# Altium PCB LM2596_DC_DC.PcbDoc
Units mm, origin at the board's own origin, x right, y up, seen from the top; angles counter-clockwise.
Board outline 43.5 x 27.5 mm, 2 copper layers (Top Layer, Bottom Layer), stack 1.571 mm thick; 7 components, 5 nets, 26 pads, 59 vias.
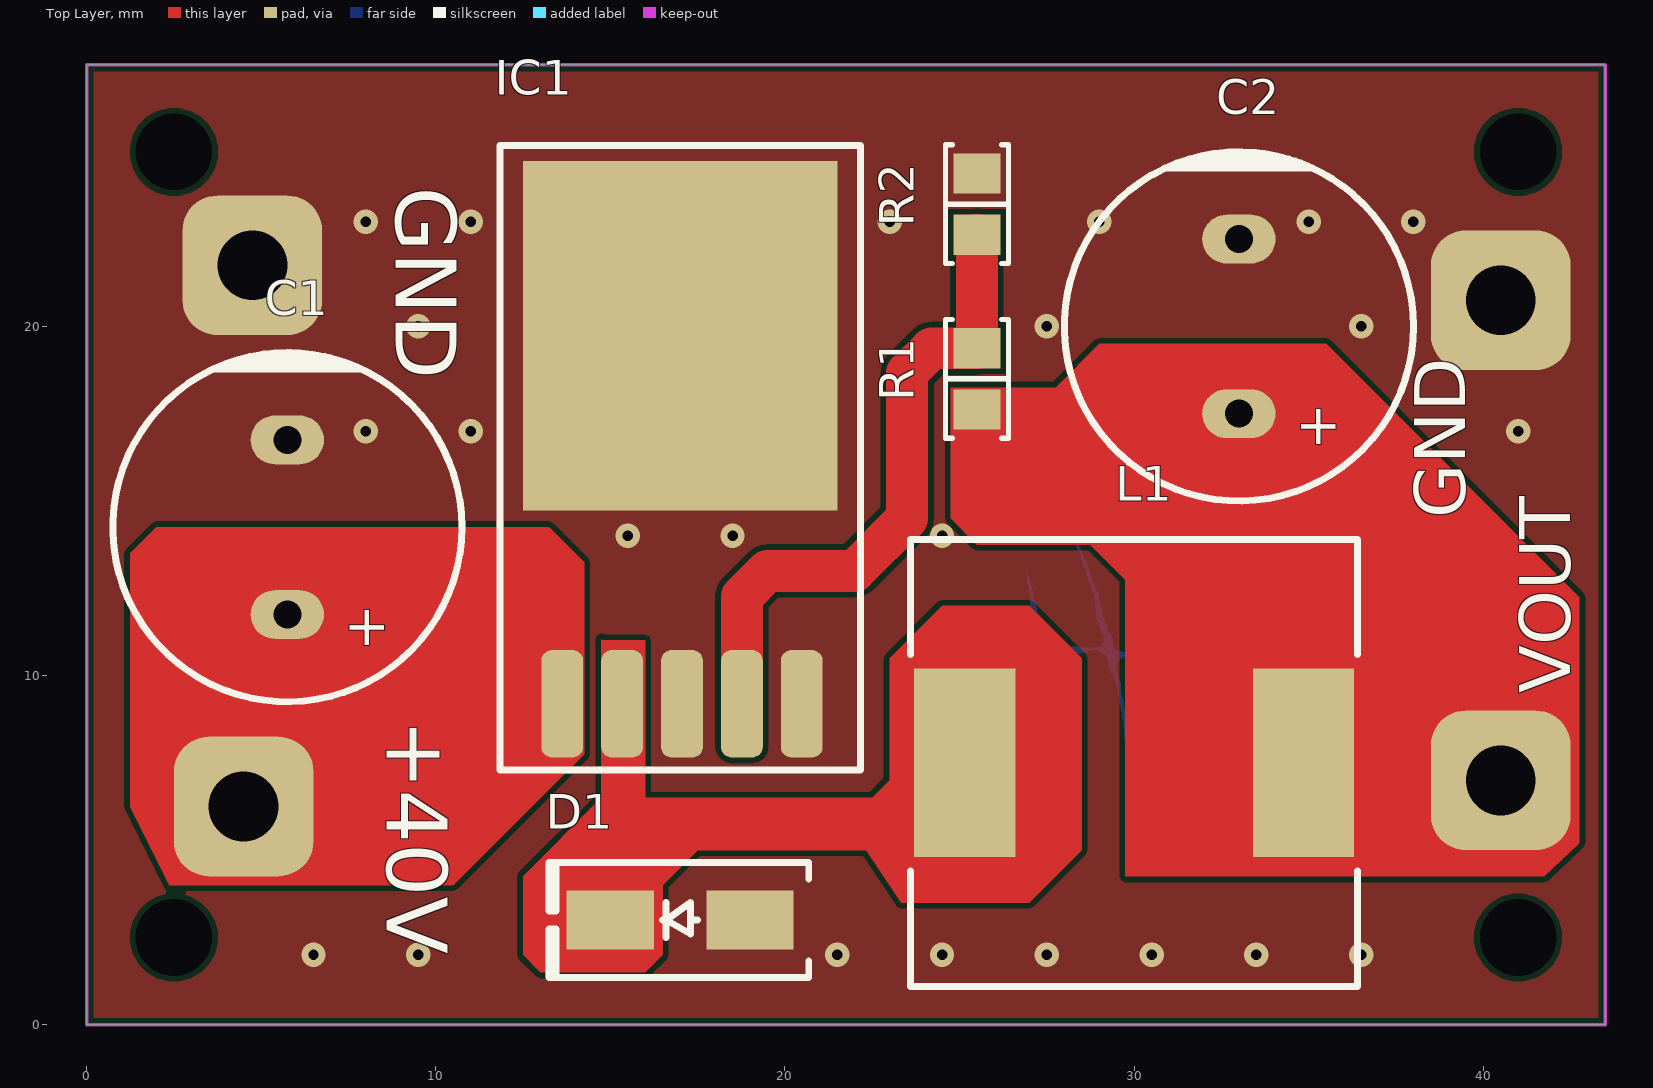
[diagram p0: Top Layer view]
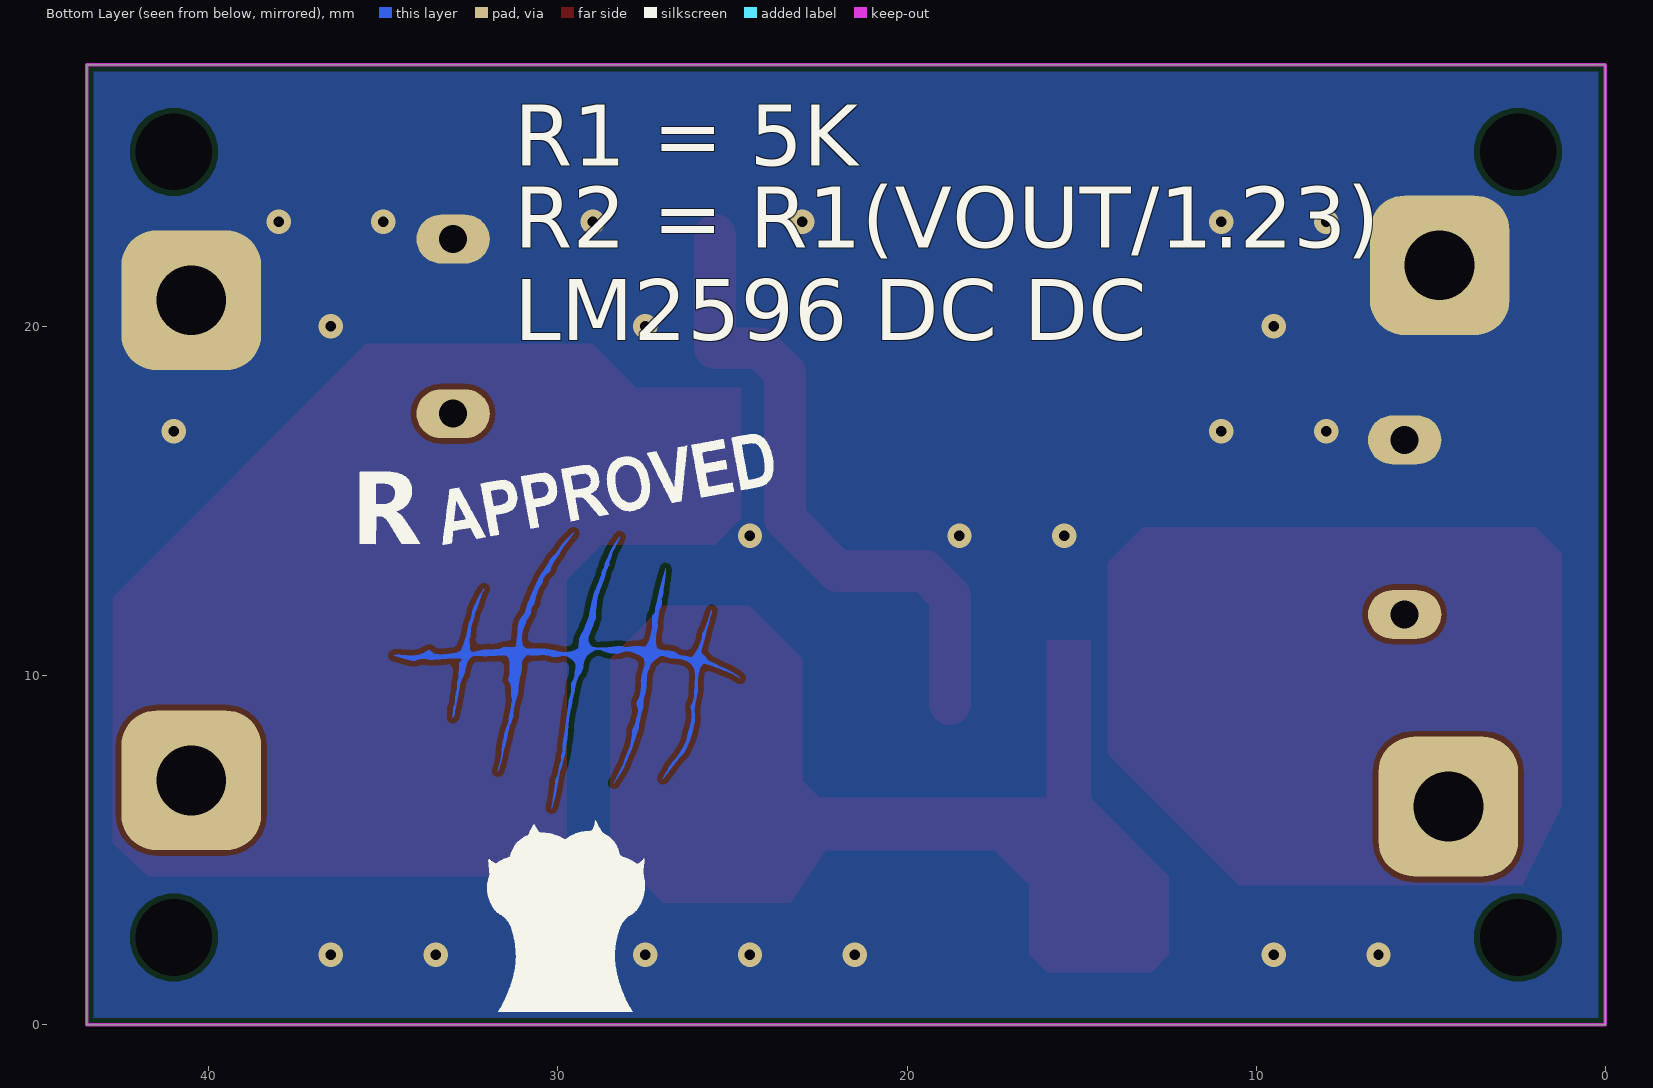
[diagram p1: Bottom Layer view, seen from below]
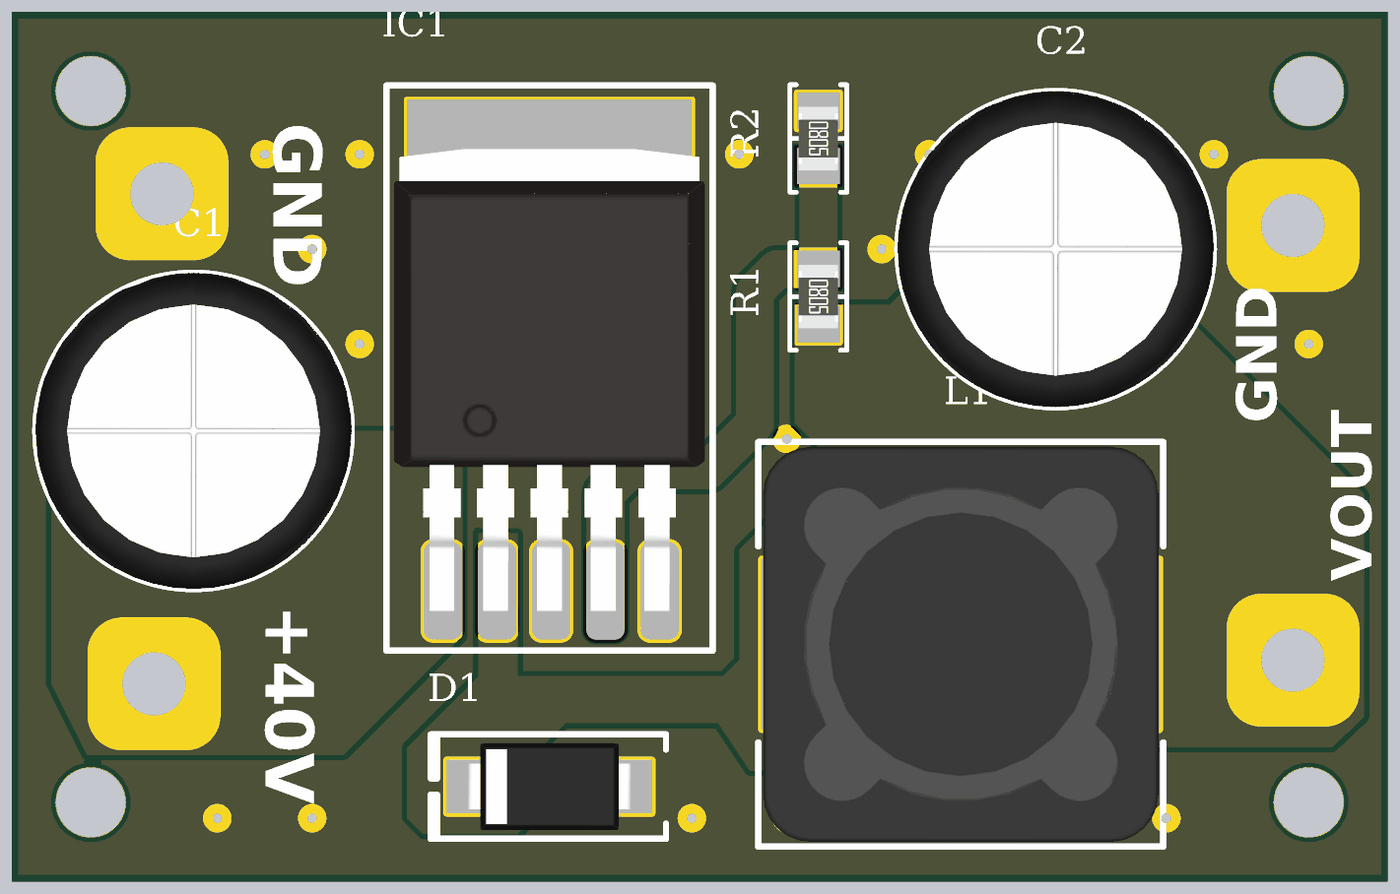
[diagram p2: 3D render of the assembled board from above, using the file's embedded part models]

## Layer stack, top to bottom
Top Solder: solder mask 0.0102, Solder Resist, Dk 3.5
Top Layer: signal copper 0.0356
Dielectric 1: dielectric 1.5, FR-4, Dk 4.8
Bottom Layer: signal copper 0.0356
Bottom Solder: solder mask 0.0102, Solder Resist, Dk 3.5

## Board outline
0,0 43.5,0 43.5,27.5 0,27.5

## Design rules (kind name [scope] priority, off if disabled: settings)
Clearance [All] p1: gap=0.152 ignorepadtopadclearanceinfootprint=FALSE
HoleSize [All] p1: absolutevalues=TRUE maxlimit=5 minlimit=0.025 maxpercent=80.000 minpercent=20.000
PolygonConnect [All] p1: connectstyle=Direct reliefconductorwidth=0.254 reliefentries=4 polygonreliefangle="90 Angle" airgapwidth=0.254
RoutingVias [All] p1: holewidth=0.711 width=1.27 viastyle="Through Hole" minholewidth=0.711 minwidth=1.27 maxholewidth=0.711 maxwidth=1.27
SolderMaskExpansion [All] p1: expansion=0.102 istentingtop=FALSE
Width [All] p1: maxlimit=2 minlimit=0.152 preferedwidth=0.5
29 further rules are at their usual default settings.

## Components (designator, comment, footprint, x,y, rotation, side; value= is the part's Value field where it differs from the comment)
C1 "100µF" "CAP TH ALUM ELEC D10.00mm S5.00mm H13.50mm" 5.75,14.25 r270 top
C2 "220µF" "CAP TH ALUM ELEC D10.00mm S5.00mm H17.00mm" 33,20 r270 top
D1 "ACDBA560-HF" "DO214AC SMA" 17,3 r180 top
IC1 "LM2596" D2PAK 16.997,18.124 r0 top
L1 "33 µH" "BOURNS SRR1280" 30,7.5 r0 top
R1 "4.7 kOhms" "RES 0805_2012" 25.5,18.5 r270 top
R2 "10 kOhms" "RES 0805_2012" 25.5,23.5 r270 top

## Footprints (in the part's own frame and the unit in brackets; to place one, negate y for a bottom-side part, rotate by r counter-clockwise, add the part's x,y. Pads: shape width x height; smd on the part's side, far side on the other; paste and mask are expansions set on the pad)
"BOURNS SRR1280" [mm] "Precision Wire Wound Inductor, 2-Leads, Body 12.50x12.50mm, IPC Medium Density"
  rect 2.9x5.4 smd: 1(-4.85,0) 2(4.85,0)
  silkscreen extent -6.4,-6.4 6.4,6.4, body extent -6.25,-6.25 6.25,6.25, height 7.9
"CAP TH ALUM ELEC D10.00mm S5.00mm H13.50mm" [mm] "10mm Diameter 5mm Lead Spacing Aluminum Electrolytic Capacitors Radial, Can"
  oval 1.4x2.1 hole 0.8: 1(2.5,0) 2(-2.5,0)
  silkscreen extent -5,-5 5,5, body extent -5.01,-5 5,5, height 13.5
"CAP TH ALUM ELEC D10.00mm S5.00mm H17.00mm" [mm] "10mm Diameter 5mm Lead Spacing Aluminum Electrolytic Capacitors Radial, Can"
  oval 1.4x2.1 hole 0.8: 1(2.5,0) 2(-2.5,0)
  silkscreen extent -5,-5 5,5, body extent -5.01,-5 5,5, height 17
D2PAK [mm]
  rrect50% 1.2x3.075 smd: 1(-3.373,-8.933) 2(-1.658,-8.933) 3(0.056,-8.933) 4(1.771,-8.933) 5(3.485,-8.933)
  rect 9x10 smd: 3(0.003,1.607)
  silkscreen extent -5.15,-10.82 5.16,7.05, body extent -4.91,-9.56 4.91,5.04, height 4.22
"DO214AC SMA" [mm] "Molded Diode, 2-Leads, Body 4.30x2.60mm, IPC Medium Density"
  rect 2.5x1.7 smd: 1(-2,0) 2(2,0)
  silkscreen extent -3.68,-1.65 3.75,1.65, body extent -2.6,-1.37 2.6,1.37, height 2.4
"RES 0805_2012" [mm] "Chip Resistor, 2-Leads, Body 2.00x1.25mm, IPC Medium Density"
  rect 1.15x1.35 smd: 1(-0.875,0) 2(0.875,0)
  silkscreen extent -1.7,-0.9 1.7,0.9, body extent -1,-0.62 1,0.63, height 0.6

## Part data
C1: library part ECA-1JHG101, "CAP ALUM 100UF 20% 63V RADIAL", Device Package="Radial, Can", Lifetime @ Temp.="2000 Hrs @ 105°C", manufacturer="Panasonic Electronic Components", Operating Temperature="-55°C ~ 105°C", Ripple Current @ High Frequency="322.5mA @ 100kHz", Ripple Current @ Low Frequency="215mA @ 120Hz", Supplier Part Number 1=P5582-ND, Tolerance=±20%, Voltage - Rated=63V, Applications="General Purpose", Capacitance=100µF, componentlink1description=Datasheet, componentlink1url=http://industrial.panasonic.com/www-cgi/jvcr13pz.cgi?E+PZ+3+ABA0026+ECA1JHG101+7+WW, componentlink2description="DigiKey Link", componentlink2url=http://digikey.com/product-detail/en/panasonic-electronic-components/ECA-1JHG101/P5582-ND/245181, Height - Seated (Max)="0.532\" (13.50mm)", lastupdated="2.09.2020 01:31:06", Lead Spacing="0.197\" (5.00mm)", Lifecycle Status=Active, Minimum Order=1, Mounting Type="Through Hole", Package / Case="Radial, Can", packaging=Bulk, Part Number=ECA-1JHG101, Part Status=Active, partid=10746, Polarization=Polar, price=0.54, series=NHG, Size / Dimension="0.394\" Dia (10.00mm)", Supplier 1=DigiKey
C2: library part ECA-1JM221B, "CAP ALUM 220UF 20% 63V RADIAL", Device Package="Radial, Can", Lifetime @ Temp.="2000 Hrs @ 85°C", manufacturer="Panasonic Electronic Components", Operating Temperature="-40°C ~ 85°C", Ripple Current @ High Frequency="765mA @ 10kHz", Ripple Current @ Low Frequency="450mA @ 120Hz", Supplier Part Number 1=P19539CT-ND, Tolerance=±20%, Voltage - Rated=63V, Applications="General Purpose", Capacitance=220µF, componentlink1description=Datasheet, componentlink1url=//media.digikey.com/pdf/Data%20Sheets/Panasonic%20Electronic%20Components/ECA-xxM%20Series,TypeA.pdf, componentlink2description="DigiKey Link", componentlink2url=http://digikey.com/product-detail/en/panasonic-electronic-components/ECA-1JM221B/P19539CT-ND/6109437, Height - Seated (Max)="0.669\" (17.00mm)", lastupdated="2.09.2020 01:31:21", Lead Spacing="0.197\" (5.00mm)", Lifecycle Status=Active, Minimum Order=1, Mounting Type="Through Hole", Package / Case="Radial, Can", packaging=TapeAndBox, Part Number=ECA-1JM221B, Part Status=Active, partid=11758, Polarization=Polar, price=0.16, series=M, Size / Dimension="0.394\" Dia (10.00mm)", Supplier 1=DigiKey
D1: "DIODE SCHOTTKY 60V 5A DO214AC", Capacitance @ Vr, F="250pF @ 4V, 1MHz", Current - Average Rectified (Io)=5A, Current - Reverse Leakage @ Vr="500 µA @ 60 V", manufacturer="Comchip Technology", Operating Temperature - Junction="-55°C ~ 125°C", Package / Case="DO-214AC, SMA", Supplier Device Package="DO-214AC (SMA)", Supplier Part Number 1=641-2078-1-ND, Voltage - DC Reverse (Vr) (Max)="60 V", Voltage - Forward (Vf) (Max) @ If="700 mV @ 5 A", componentlink1description=Datasheet, componentlink1url=http://www.comchiptech.com/admin/files/product/ACDBA560-HF%20RevA201382.pdf, componentlink2description="DigiKey Link", componentlink2url=https://www.digikey.com/en/products/detail/comchip-technology/ACDBA560-HF/7100903, Diode Type=Schottky, lastupdated="3.06.2024 19:54:37", Lifecycle Status=Active, Minimum Order=1, Mounting Type="Surface Mount", packaging=TapeAndReel, Part Number=ACDBA560-HF, Part Status=Active, partid=1832, price=0.15, series=-, Speed="Fast Recovery =< 500ns, > 200mA (Io)", Supplier 1=DigiKey
IC1: "IC-2596 V.REG.3A STEP-DOWN TO-263-5L", Current=3A
L1: library part SRR1280-330M, "FIXED IND 33UH 3.5A 57 MOHM SMD", Current - Saturation=3.3A, Current Rating (Amps)="3.5 A", DC Resistance (DCR)="57mOhm Max", Device Package=Nonstandard, Frequency - Self Resonant=9.5MHz, manufacturer="Bourns Inc.", Operating Temperature="-40°C ~ 125°C", Q @ Freq="28 @ 2.52MHz", Supplier Part Number 1=SRR1280-330MCT-ND, Tolerance=±20%, Inductance Frequency - Test="100 kHz", componentlink1description=Datasheet, componentlink1url=https://www.bourns.com/docs/Product-Datasheets/SRR1280.pdf, componentlink2description="DigiKey Link", componentlink2url=https://www.digikey.com/en/products/detail/bourns-inc/SRR1280-330M/1969998, Height - Seated (Max)="0.315\" (8.00mm)", lastupdated="25.11.2024 00:45:31", Lifecycle Status=Active, Material - Core=Ferrite, Minimum Order=1, Mounting Type="Surface Mount", Package / Case=Nonstandard, packaging=TapeAndReel, Part Number=SRR1280-330M, Part Status=Active, partid=25, price=0.45, series=SRR1280, Shielding=Shielded, Size / Dimension="0.492\" L x 0.492\" W (12.50mm x 12.50mm)", Supplier 1=DigiKey, Type="Drum Core, Wirewound", Inductance="33 µH"
R1: library part CRGP0805F4K7, "RES 4.7K OHM 1% 1/3W 0805", Device Package="0805 (2012 Metric)", manufacturer="TE Connectivity Passive Product", Operating Temperature="-55°C ~ 155°C", Power (Watts)="0.333W, 1/3W", Supplier Device Package=0805, Supplier Part Number 1=A130485CT-ND, Temperature Coefficient=±100ppm/°C, Tolerance=±1%, componentlink1description=Datasheet, componentlink1url=https://www.te.com/commerce/DocumentDelivery/DDEController?Action=srchrtrv&DocNm=9-1773463-9&DocType=DS&DocLang=English, componentlink2description="DigiKey Link", componentlink2url=https://www.digikey.com/en/products/detail/te-connectivity-passive-product/CRGP0805F4K7/8577087, Composition="Thick Film", Features="Pulse Withstanding", Height - Seated (Max)="0.026\" (0.65mm)", lastupdated="8.02.2024 21:02:34", Lifecycle Status=Active, Minimum Order=1, Number of Terminations=2, Package / Case="0805 (2012 Metric)", packaging=TapeAndReel, Part Number=CRGP0805F4K7, Part Status=Active, partid=28726, price=0.02, Resistance="4.7 kOhms", series=CRGP, Size / Dimension="0.079\" L x 0.049\" W (2.00mm x 1.25mm)", Supplier 1=DigiKey
R2: library part CPF0805B10KE, "RES SMD 10K OHM 0.1% 1/10W 0805", Device Package="0805 (2012 Metric)", manufacturer="TE Connectivity Passive Product", Operating Temperature="-55°C ~ 155°C", Power (Watts)="0.1W, 1/10W", Supplier Device Package=0805, Supplier Part Number 1=A106043CT-ND, Temperature Coefficient=±25ppm/°C, Tolerance=±0.1%, componentlink1description=Datasheet, componentlink1url=https://www.te.com/commerce/DocumentDelivery/DDEController?Action=srchrtrv&DocNm=1773200&DocType=DS&DocLang=English, componentlink2description="DigiKey Link", componentlink2url=https://www.digikey.com/en/products/detail/te-connectivity-passive-product/CPF0805B10KE/2389790, Composition="Thin Film", Height - Seated (Max)="0.026\" (0.65mm)", lastupdated="8.02.2024 21:02:39", Lifecycle Status=Active, Minimum Order=1, Number of Terminations=2, Package / Case="0805 (2012 Metric)", packaging=TapeAndReel, Part Number=CPF0805B10KE, Part Status=Active, partid=27724, price=0.09, Resistance="10 kOhms", series="CPF, Neohm", Size / Dimension="0.079\" L x 0.049\" W (2.00mm x 1.25mm)", Supplier 1=DigiKey

## Free pads (board coordinates)
  rrect50% 0x0 hole 2.2: GND(2.5,2.5) GND(2.5,25) GND(41,2.5) GND(41,25)
  rrect50% 4x4 hole 2: GND(4.75,21.75) GND(40.5,20.75) VIN(4.5,6.25) VOUT(40.5,7)

## Via types
v1: diameter 0.7, hole 0.3, Top Layer to Bottom Layer, 59 vias

## Nets (pads, with @x,y where several pads share a name; then routed paths per layer and width w, separated by ;. In a path a pad name is that pad's centre, name@x,y a point inside that pad or via, vN(x,y) a via of type N, cw(c..) or ccw(c..) an arc to the next point about the centre after c; other vN are vias at no path point)
+12: C2.1 L1.2 pad.VOUT R1.2
FeedBack: IC1.4 R1.1 R2.2 | length 18.4
  Top Layer w1.2: IC1.4 18.768,12.268 19.5,13 22,13 23.5,14.5 23.5,18.672 24.203,19.375 R1.1 R2.2
GND: C1.2 C2.2 D1.1 IC1.3 IC1.5 pad.GND@4.75,21.75 pad.GND@40.5,20.75 R2.1
  other v1: 6.5,2 9.5,2 9.5,2 9.5,2 21.5,2 21.5,2 21.5,2 24.5,2 24.5,2 24.5,2 27.5,2 27.5,2 27.5,2 30.5,2 30.5,2 30.5,2 33.5,2 36.5,2 15.5,14 15.5,14 15.5,14 18.5,14 18.5,14 18.5,14 24.5,14 24.5,14 24.5,14 8,17 8,17 8,17 11,17 11,17 11,17 41,17 9.5,20 9.5,20 9.5,20 27.5,20 27.5,20 27.5,20 36.5,20 8,23 8,23 8,23 11,23 11,23 11,23 23,23 23,23 23,23 29,23 29,23 29,23 35,23 35,23 35,23 38,23 38,23 38,23
NetD1_2: D1.2 IC1.2 L1.1
VCC: C1.1 IC1.1 pad.VIN

## Polygon pours and split planes (outlines as drawn)
GND on Bottom Layer "GND_L02_P001" (solid, pour order 1): 0,27.5 43.5,27.5 43.5,0 0,0
GND on Top Layer "GND_L01_P002" (solid, pour order 2): 0,27.5 43.5,27.5 43.5,0 0,0

## Keep-outs
Keep-Out Layer:
  the board outline again, w0.1

## Other copper
Top Layer:
  region net +12: 24.75,18.25 27.75,18.25 29,19.5 35.5,19.5 42.75,12.25 42.75,5.2 41.75,4.25 29.75,4.25 29.75,12.75 28.75,13.75 25.5,13.75 24.75,14.5
  region net VCC: 14.25,7.75 10.5,4 2.375,4 1.25,6.25 1.25,13.5 2,14.25 13.25,14.25 14.25,13.25
  region net NetD1_2: 14.748,11.043 14.748,6.498 12.5,4.25 12.5,2 13,1.5 16,1.5 16.5,2 16.5,4 17.5,5 22.333,5 23.333,3.5 27,3.5 28.5,5 28.5,10.5 27,12 24.5,12 23,10.5 23,7 22.5,6.5 16,6.5 16,11 15.99,11.01 14.74,11.01
Bottom Layer:
  region: 2930 vertices and 0 holes, not listed, extent 24.776,6.202 34.696,14.09

## Silkscreen, mask and mechanical layers (free items; w line width, h text height)
Top Overlay:
  text "GND" at 8.276,24 h3 r270
  text "GND" at 39.978,14.5 h2.5 r90
  text "VOUT" at 42.978,9.5 h2.5 r90
  text "+40V" at 8.026,8.75 h3 r270
Bottom Overlay:
  drawing of 10 lines, arcs and shapes, not listed
  text "R1 = 5K" at 31.25,24.026 h3
  text "R2 = R1(VOUT/1.23)" at 31.25,21.675 h3
  text "LM2596 DC DC" at 31.25,19.026 h3
Bottom Solder:
  region: 2930 vertices and 0 holes, not listed, extent 24.776,6.202 34.696,14.09

## Text inside footprints (layer, text, board x,y; h text height)
C1: Top Overlay "+" at 7.15,12.05 h2 r270
C2: Top Overlay "+" at 34.4,17.8 h2 r270